# Altium PCB Shared_IoT_Dev_bk1.PcbDoc
Units mm, origin at the board's own origin, x right, y up, seen from the top; angles counter-clockwise.
Board outline 66.67 x 60.32 mm, 2 copper layers (Top Layer, Bottom Layer); 59 components, 68 nets, 257 pads, 0 vias.
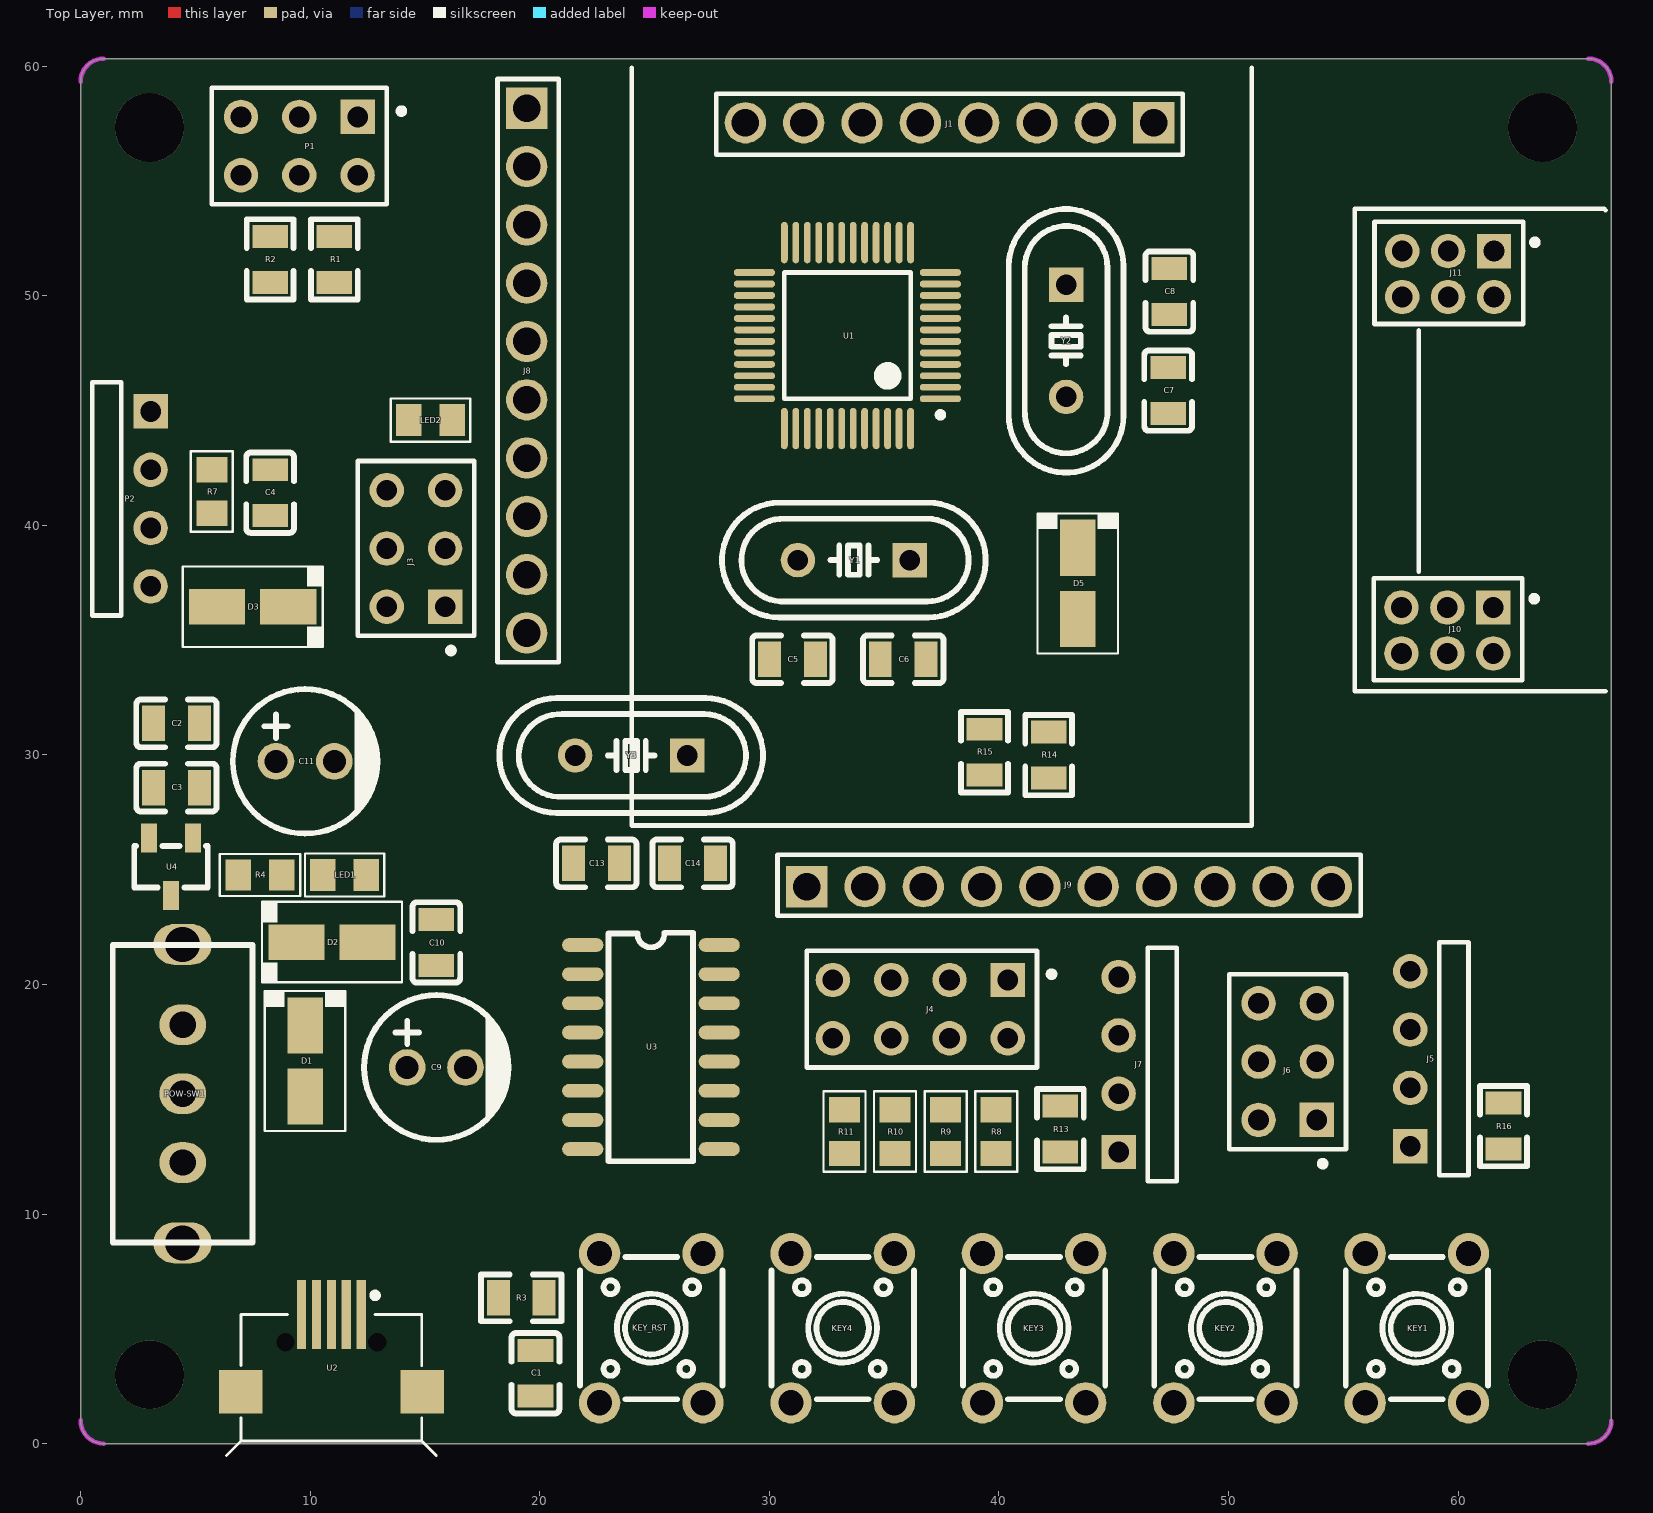
[diagram p0: Top Layer view]
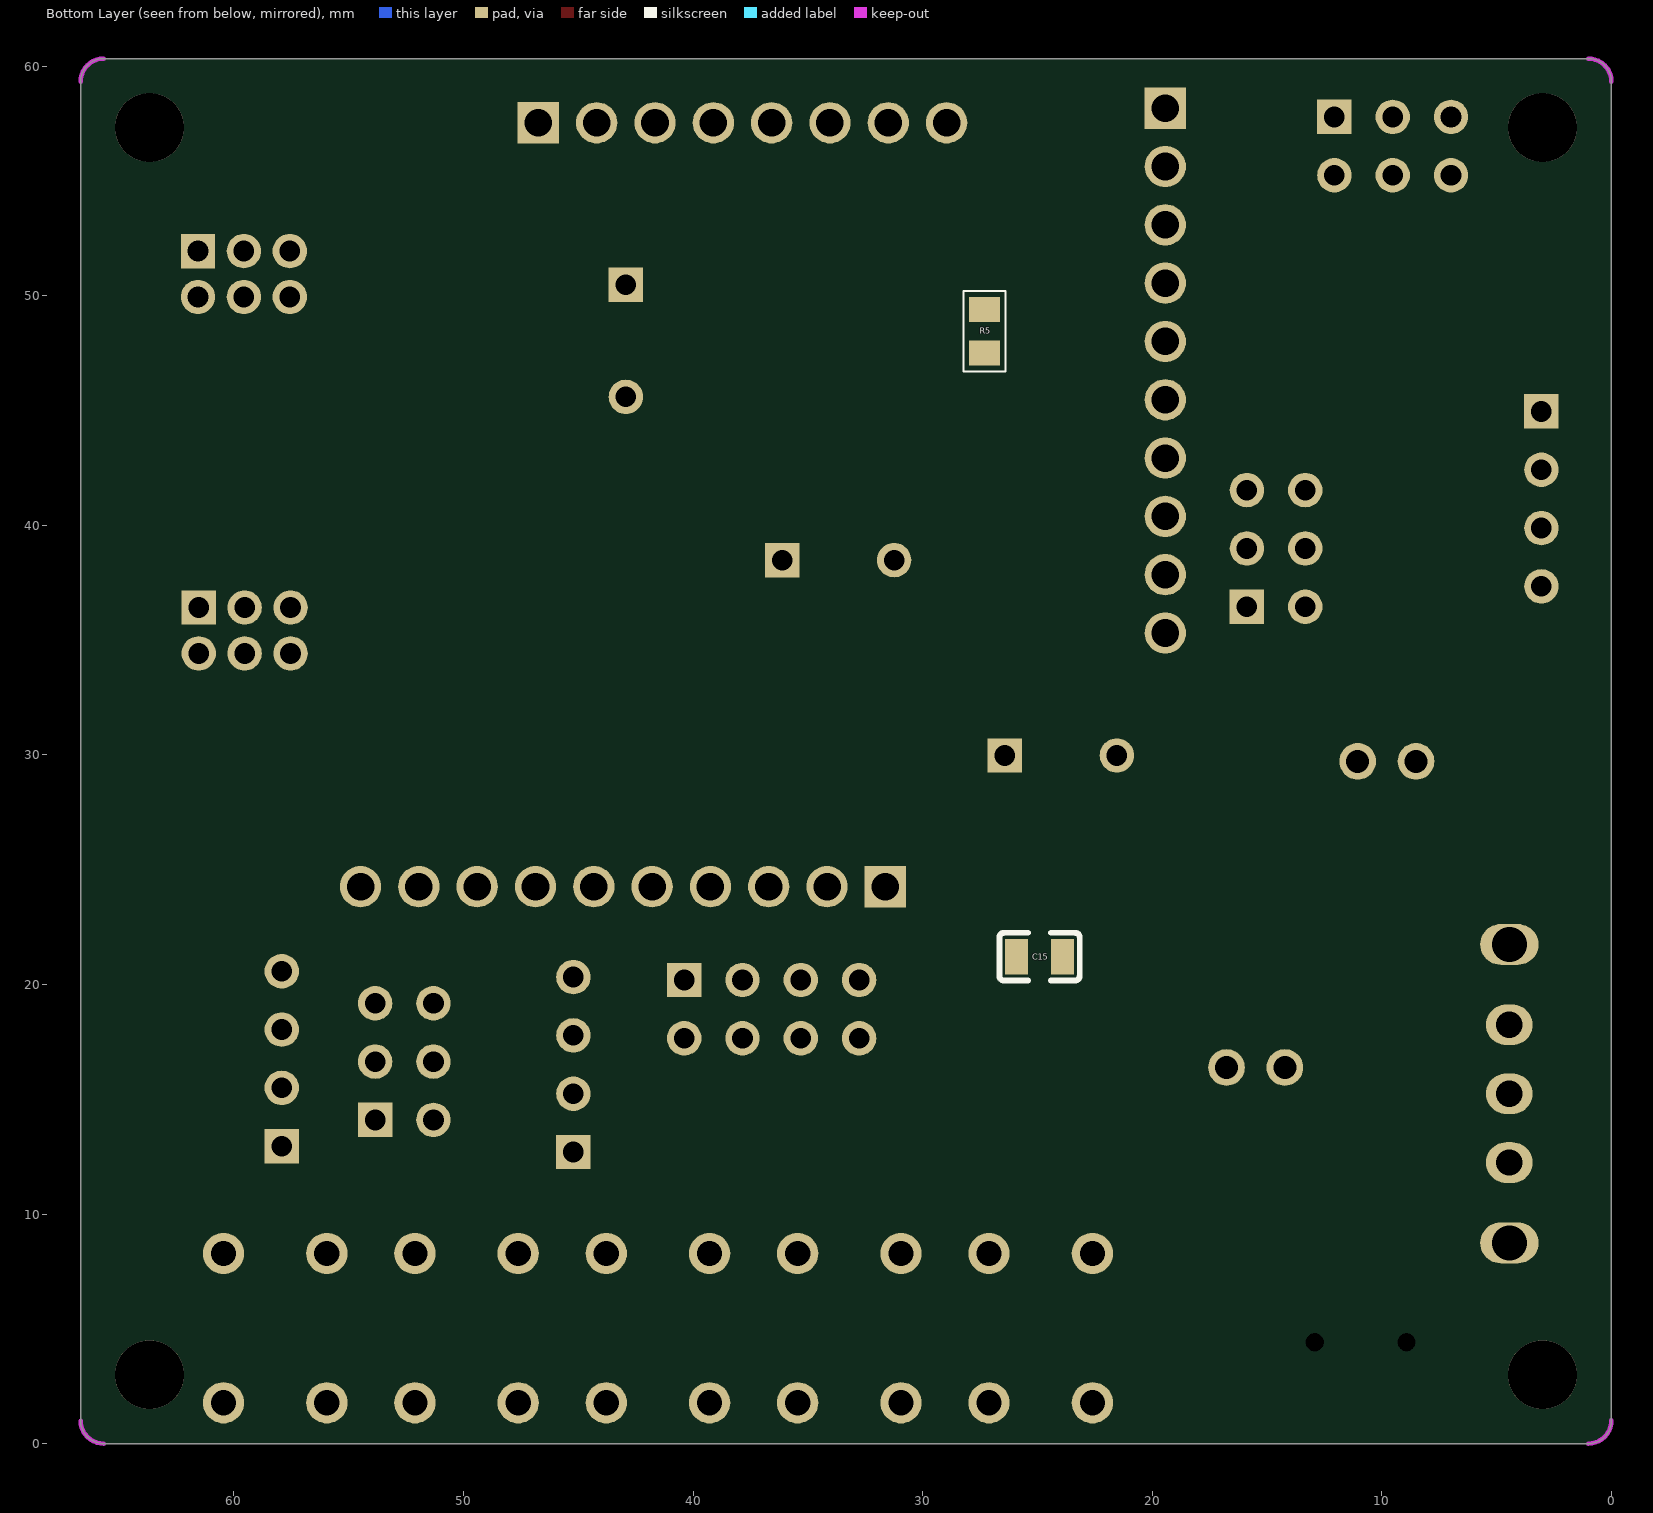
[diagram p1: Bottom Layer view, seen from below]

## Layer stack, top to bottom
Top Solder: solder mask 0.0102, Solder Resist, Dk 3.5
Top Layer: signal copper 0.0356
Dielectric 1: dielectric 0.32, FR-4, Dk 4.8
Bottom Layer: signal copper 0.0356
Bottom Solder: solder mask 0.0102, Solder Resist, Dk 3.5

## Board outline
1,0 cw(c1,1) 0,1.016 0,1 0,59.325 cw(c1,59.325) 1.016,60.325 1,60.325 65.675,60.325 cw(c65.675,59.325) 66.675,59.309 66.675,59.325 66.675,1 cw(c65.675,1) 65.659,0 65.675,0

## Design rules (kind name [scope] priority, off if disabled: settings)
Clearance via_poly [IsVia vs InPolygon] p1: gap=0.152
Clearance poly [InPolygon] p2: gap=0.254
Clearance all [All] p3: gap=0.152
HoleToHoleClearance [All] p1: gap=0 allowstackedmicrovias=TRUE
MinimumSolderMaskSliver [All] p1: minsoldermaskwidth=0
PolygonConnect [All] p1: connectstyle=Relief reliefconductorwidth=0.457 reliefentries=4 polygonreliefangle="90 Angle" airgapwidth=0.254
RoutingVias [All] p1: holewidth=0.305 width=0.61 viastyle="Through Hole" minholewidth=0.305 minwidth=0.61 maxholewidth=0.305 maxwidth=0.61
SilkToSilkClearance [All] p1: silktosilkclearance=0.051
SilkToSolderMaskClearance [IsPad] p1: minsilkscreentomaskgap=0.051 clearancetoexposedcopper=TRUE
SolderMaskExpansion [All] p1: expansion=0.064
Width gnd [InNetClass('GND')] p1: maxlimit=0.762 minlimit=0.254 preferedwidth=0.508
Width pwr [InNetClass('PWR')] p2: maxlimit=0.762 minlimit=0.254 preferedwidth=0.508
Width wall [All] p3: maxlimit=0.152 minlimit=0.152 preferedwidth=0.152
26 further rules are at their usual default settings.

## Classes and differential pairs
net class GND: GND
net class PWR: VBUS VCC3V3 VCC5V

## Components (designator, comment, footprint, x,y, rotation, side; value= is the part's Value field where it differs from the comment)
C1 "CAP" C0805 19.812,4.064 r270 top
C2 "CAP" C0805 3.175,31.369 r0 top
C3 "CAP" C0805 3.175,28.575 r0 top
C4 "CAP" C0805 8.255,40.418 r90 top
C5 "CAP" C0805 32.004,34.163 r180 top
C6 "CAP" C0805 34.83,34.163 r0 top
C7 "CAP" C0805 47.371,44.863 r90 top
C8 "CAP" C0805 47.423,51.178 r270 top
C9 "CAP_POL" CAP-TH_POL 14.224,16.383 r0 top
C10 "CAP" C0805 15.494,22.828 r270 top
C11 "CAP_POL" CAP-TH_POL 8.509,29.718 r0 top
C13 "22pF" C0805 21.463,25.273 r0 top
C14 "22pF" C0805 27.654,25.273 r180 top
C15 "0.1uF" C0805 25.908,21.209 r180 bottom
D1 "1N4007" SMA 9.779,16.663 r270 top
D2 "1N4007" SMA 10.948,21.844 r0 top
D3 "1N4007" SMA 7.493,36.449 r180 top
D5 "Diode 1N4148" SMA 43.434,37.465 r270 top
J1 "Header_8" HDR-TH_8P-P2.54-V 46.736,57.531 r180 top
J3 "Header 3X2" HDR2X3 15.875,36.449 r90 top
J4 "Header4x2" HDR2X4 40.386,20.193 r180 top
J5 "DHT11" HDR1X4H 57.912,12.954 r90 top
J6 "Header 3X2" HDR2X3 53.848,14.097 r90 top
J7 "DS18B20" HDR1X4H 45.212,12.7 r90 top
J8 "Header_10" HDR-TH_10P-P2.54-V 19.431,58.166 r270 top
J9 "Header_10" HDR-TH_10P-P2.54-V 31.623,24.257 r0 top
J10 "Header3X2_Small" HDR3X2_Small 61.531,36.417 r180 top
J11 "Header3X2_Small" HDR3X2_Small 61.563,51.943 r180 top
KEY1 "KEY" KEY-TH_4P 55.951,1.778 r90 top
KEY2 "KEY" KEY-TH_4P 47.615,1.778 r90 top
KEY3 "KEY" KEY-TH_4P 39.279,1.778 r90 top
KEY4 "KEY" KEY-TH_4P 30.942,1.778 r90 top
KEY_RST "KEY" KEY-TH_4P 22.606,1.778 r90 top
LED1 "LED2_1" 0805C 11.496,24.765 r0 top
LED2 "LED2_1" 0805C 15.24,44.577 r180 top
P1 "Header 3X2" HDR2X3 12.065,57.785 r180 top
P2 "SWD" HDR1X4H 3.048,44.958 r270 top
POW-SW1 "Switch" SW 4.445,15.24 r90 top
R1 "100K,0603" R0805 11.049,50.578 r90 top
R2 "100K,0603" R0805 8.255,52.578 r270 top
R3 "10K,0603" R0805 20.193,6.35 r180 top
R4 "Res2" 0805R 7.813,24.765 r0 top
R5 "Res2" 0805R 27.305,48.448 r270 bottom
R7 "Res2" 0805R 5.715,41.468 r90 top
R8 "Res2" 0805R 39.878,13.589 r270 top
R9 "Res2" 0805R 37.677,13.589 r270 top
R10 "Res2" 0805R 35.475,13.589 r270 top
R11 "Res2" 0805R 33.274,13.589 r270 top
R13 "4.7K" R0805 42.672,14.7 r270 top
R14 "100" R0805 42.164,28.988 r90 top
R15 "100" R0805 39.37,29.115 r90 top
R16 "4.7K" R0805 61.976,14.827 r270 top
U1 "STM32F103C8T6" 48P 33.401,48.26 r180 top
U2 "USB-mrico" MICRO_USB 10.922,3.937 r0 top
U3 "CH340G" CH340G_SOIC 21.869,21.717 r180 top
U4 "XC6206P332MR" XC_SOT-23-3 4.887,26.375 r90 top
Y1 "32.768K" CRYSTAL 36.119,38.481 r180 top
Y2 "8M" CRYSTAL 42.926,50.47 r270 top
Y3 "CRYSTAL_12M" CRYSTAL 26.416,29.972 r180 top

## Footprints (in the part's own frame and the unit in brackets; to place one, negate y for a bottom-side part, rotate by r counter-clockwise, add the part's x,y. Pads: shape width x height; smd on the part's side, far side on the other; paste and mask are expansions set on the pad)
48P [mm]
  oval 1.8x0.3 smd: 1(-4.05,2.75) 2(-4.05,2.25) 3(-4.05,1.75) 4(-4.05,1.25) 5(-4.05,0.75) 6(-4.05,0.25) 7(-4.05,-0.25) 8(-4.05,-0.75) 9(-4.05,-1.25) 10(-4.05,-1.75) 11(-4.05,-2.25) 12(-4.05,-2.75) 25(4.05,-2.75) 26(4.05,-2.25) 27(4.05,-1.75) 28(4.05,-1.25) 29(4.05,-0.75) 30(4.05,-0.25) 31(4.05,0.25) 32(4.05,0.75) 33(4.05,1.25) 34(4.05,1.75) 35(4.05,2.25) 36(4.05,2.75)
  oval 0.3x1.8 smd: 13(-2.75,-4.05) 14(-2.25,-4.05) 15(-1.75,-4.05) 16(-1.25,-4.05) 17(-0.75,-4.05) 18(-0.25,-4.05) 19(0.25,-4.05) 20(0.75,-4.05) 21(1.25,-4.05) 22(1.75,-4.05) 23(2.25,-4.05) 24(2.75,-4.05) 37(2.75,4.05) 38(2.25,4.05) 39(1.75,4.05) 40(1.25,4.05) 41(0.75,4.05) 42(0.25,4.05) 43(-0.25,4.05) 44(-0.75,4.05) 45(-1.25,4.05) 46(-1.75,4.05) 47(-2.25,4.05) 48(-2.75,4.05)
  silkscreen extent -4.18,-2.75 2.75,3.57, body extent -3.5,-3.5 3.5,3.5, height 1.6
0805C [mm] "Chip Capacitor, 2-Leads, Body 2.0x1.3mm, IPC Medium Density"
  rect 1.1x1.4 smd: 1(-0.95,0) 2(0.95,0)
  silkscreen extent -1.73,-0.94 1.73,0.94, body extent -1.05,-0.67 1.05,0.67, height 1.2
0805R [mm] "Chip Resistor, 2-Leads, Body 2.0x1.3mm, IPC Medium Density"
  rect 1.1x1.35 smd: 1(-0.95,0) 2(0.95,0)
  silkscreen extent -1.75,-0.91 1.75,0.91, body extent -1.05,-0.67 1.05,0.67, height 1.2
C0805 [mm]
  rect 1x1.55 smd: 1(0,0) 2(2,0)
  silkscreen extent -0.75,-1.04 2.75,1.04
CAP-TH_POL [mm]
  round 1.6 hole 1: 1(0,0) 2(2.54,0)
  silkscreen extent -1.88,-3.15 4.44,3.15
CH340G_SOIC [mm]
  oval 1.798x0.6 smd: 1(0,0) 2(0,1.27) 3(0,2.54) 4(0,3.81) 5(0,5.08) 6(0,6.35) 7(0,7.62) 8(0,8.89) 9(-5.944,8.89) 10(-5.944,7.62) 11(-5.944,6.35) 12(-5.944,5.08) 13(-5.944,3.81) 14(-5.944,2.54) 15(-5.944,1.27) 16(-5.944,0)
  silkscreen extent -4.8,-0.53 -1.12,9.42
CRYSTAL [mm]
  rect 1.5x1.5 hole 0.9: 1(0,0)
  round 1.5 hole 0.9: 2(4.877,0)
  silkscreen extent -3.3,-2.5 8.18,2.5
HDR1X4H [mm] "Connector; Header; 4 Position; Right Angle"
  rect 1.5x1.5 hole 0.9: 1(0,0)
  round 1.5 hole 0.9: 2(2.54,0) 3(5.08,0) 4(7.62,0)
  silkscreen extent -1.27,-2.54 8.89,-1.27
HDR2X3 [mm] "Connector; Header; 3x2 Position"
  rect 1.5x1.5 hole 0.9: 1(0,0)
  round 1.5 hole 0.9: 2(0,2.54) 3(2.54,0) 4(2.54,2.54) 5(5.08,0) 6(5.08,2.54)
  silkscreen extent -2.03,-1.27 6.35,3.81
HDR2X4 [mm]
  rect 1.5x1.5 hole 0.9: 1(0,0)
  round 1.5 hole 0.9: 2(0,2.54) 3(2.54,0) 4(2.54,2.54) 5(5.08,0) 6(5.08,2.54) 7(7.62,0) 8(7.62,2.54)
  silkscreen extent -2.03,-1.27 8.76,3.81
HDR3X2_Small [mm]
  rect 1.5x1.5 hole 0.9: 1(0,0)
  round 1.5 hole 0.9: 2(0,2) 3(2,0) 4(2,2) 5(4,0) 6(4,2)
  silkscreen extent -1.91,-1.27 5.21,3.18
HDR-TH_8P-P2.54-V [mm]
  rect 1.8x1.8 hole 1.2: 1(0,0)
  round 1.8 hole 1.2: 2(2.54,0) 3(5.08,0) 4(7.62,0) 5(10.16,0) 6(12.7,0) 7(15.24,0) 8(17.78,0)
  silkscreen extent -1.27,-1.27 19.05,1.4
HDR-TH_10P-P2.54-V [mm]
  rect 1.8x1.8 hole 1.2: 1(0,0)
  round 1.8 hole 1.2: 2(2.54,0) 3(5.08,0) 4(7.62,0) 5(10.16,0) 6(12.7,0) 7(15.24,0) 8(17.78,0) 9(20.32,0) 10(22.86,0)
  silkscreen extent -1.27,-1.27 24.13,1.4
KEY-TH_4P [mm]
  round 1.8 hole 1.1: 1(0,0) 2(6.502,0) 3(0,-4.501) 4(6.502,-4.501)
  silkscreen extent 0.15,-5.35 6.35,0.85
MICRO_USB [mm]
  rect 0.4x3 smd: 1(1.3,1.679) 2(0.65,1.679) 3(0,1.679) 4(-0.65,1.679) 5(-1.3,1.679)
  round 0 hole 0.8 unplated: MH1(2,0.471) MH2(-2,0.471)
  rect 1.9x1.9 smd: ""(-3.95,-1.679) ""(3.95,-1.679)
  silkscreen extent -4.57,-4.46 4.57,2.64
R0805 [mm]
  rect 1x1.55 smd: 1(0,0) 2(2,0)
  silkscreen extent -0.75,-1.02 2.75,1.02
SMA [mm] "Molded Diode, 2-Leads, Body 4.3x2.7mm, IPC Medium Density"
  rect 2.45x1.55 smd: 1(1.55,0) 2(-1.55,0)
  silkscreen extent -3.05,-1.75 3.05,1.75, body extent -2.3,-1.45 2.3,1.45, height 2.44
SW [mil]
  oval 70x80 hole 45: 1(-118.11,0) 2(0,0) 3(118.11,0)
  oval 70x100 hole 60: 4(-255.91,0) 5(255.91,0)
  silkscreen extent -255,-120 255,120
XC_SOT-23-3 [mm]
  rect 1.25x0.7 smd: 1(0,0) 2(0,1.9) 3(-2.499,0.95)
  silkscreen extent -2.15,-0.65 -0.35,2.55

## Part data
C13 C14 C15: library part CAP, "CAP"
D1 D2 D3: library part DIODE
D5: "High Conductance Fast Diode"
J3 J6 P1: "Header, 3-Pin, Dual row"
J5 J7 P2: library part "Header 4", "Header, 4-Pin"
LED1 LED2: "Typical RED, GREEN, YELLOW, AMBER GaAs LED"
POW-SW1: library part Swich_On_Off
R1 R2 R3: library part Res2, "Resistor"
R4 R5 R8 R9 R10 R11: library part Res_3, "Resistor"
R7: "Resistor"
R13 R14 R15 R16: library part RES, "RES"
U2: library part usb-STM
U4: "XC6206P332MR Power Lower to 3.3v"
Y1 Y2 Y3: library part CRYSTAL, "CRYSTAL"

## Free pads (board coordinates)
  round 3 hole 3 unplated paste+0.305: 0(3,3) 0(3,57.325) 0(63.675,3) 0(63.675,57.325)

## Nets (pads, with @x,y where several pads share a name; then routed paths per layer and width w, separated by ;. In a path a pad name is that pad's centre, name@x,y a point inside that pad or via, vN(x,y) a via of type N, cw(c..) or ccw(c..) an arc to the next point about the centre after c; other vN are vias at no path point)
BOOT0: R1.1 U1.44
BOOT1: R2.2 U1.20
D+: U2.3 U3.5
D-: U2.2 U3.6
DHT11_DQ: J5.2 J6.2 R16.1
DS_DQ: J6.4 J7.2 R13.1
ESP_RST: J9.7 J10.1
ESP_RX: J3.1 J10.6
ESP_TX: J3.2 J11.5
GND: C1.2 C2.2 C3.2 C4.2 C5.1 C6.1 C7.2 C8.2 C9.2 C10.1 C11.2 C13.2 C14.2 C15.2 D2.1 J1.2 J5.4 J6.5 J6.6 J7.3 J7.4 J9.10 J10.5 KEY1.1 KEY2.1 KEY3.1 KEY4.1 KEY_RST.1 LED1.2 LED2.2 P1.5 P1.6 P2.1 U1.8 U1.23 U1.35 U1.47 U2.4 U2.5 U3.1 U4.1
KEY1: J4.2 KEY1.3 R8.1
KEY2: J4.4 KEY2.3 R9.1
KEY3: J4.6 KEY3.3 R10.1
KEY4: J4.8 KEY4.3 R11.1
LED2: R5.1 U1.28
NetC4_1: C4.1 D3.2 R7.2
NetC13_1: C13.1 U3.7 Y3.2
NetC14_1: C14.1 U3.8 Y3.1
NetD1_1: D1.1 POW-SW1.2 POW-SW1.3
NetD5_2: D5.2 U1.1
NetJ6_1: J6.1 R14.1
NetJ6_3: J6.3 R15.1
NetLED1_1: LED1.1 R4.2
NetLED2_1: LED2.1 R5.2
NetP1_3: P1.3 R1.2
NetP1_4: P1.4 R2.1
NetP2_4: P2.4 R7.1
OLED_CS: J1.3 U1.21
OLED_D0: J1.6 U1.26
OLED_D1: J1.7 U1.27
OLED_DC: J1.5 U1.25
OLED_RES: J1.4 U1.22
OSCIN: C7.1 U1.5 Y2.2
OSCOUT: C8.1 U1.6 Y2.1
PA0: J8.1 U1.10
PA1: J8.2 U1.11
PA4: J8.3 U1.14
PA5: J8.4 U1.15
PA6: J8.5 U1.16
PA7: J8.6 U1.17
PA8: R14.2 U1.29
PA9: J9.1 U1.30
PA10: J9.2 U1.31
PA11: J4.5 U1.32
PA12: J4.7 U1.33
PA15: J8.7 U1.38
PB0: R15.2 U1.18
PB1: J8.8 U1.19
PB3: J8.9 U1.39
PB4: J8.10 U1.40
PB5: J9.3 U1.41
PB6: J9.4 U1.42
PB7: J9.5 U1.43
PB8: J4.1 U1.45
PB9: J4.3 U1.46
PC13: J9.6 U1.2
PC14: C5.2 U1.3 Y1.2
PC15: C6.2 U1.4 Y1.1
RESET: C1.1 KEY_RST.3 R3.1 U1.7
SWCLK: P2.2 U1.37
SWIO: P2.3 U1.34
URX: J3.4 U3.3
USART2_RX: J3.5 U1.13
USART2_TX: J3.6 U1.12
UTX: J3.3 U3.2
VBUS: POW-SW1.1 U2.1
VCC3V3: C2.1 C3.1 C11.1 C15.1 D3.1 D5.1 J1.1 J5.1 J7.1 J9.8 J10.4 P1.1 P1.2 R3.2 R8.2 R9.2 R10.2 R11.2 R13.2 R16.2 U1.9 U1.24 U1.36 U1.48 U3.4 U3.16 U4.2
VCC5V: C9.1 C10.2 D1.2 D2.2 J9.9 R4.1 U4.3
pads on no net: J1.8 J5.3 J10.2 J10.3 J11.1 J11.2 J11.3 J11.4 J11.6 KEY1.2 KEY1.4 KEY2.2 KEY2.4 KEY3.2 KEY3.4 KEY4.2 KEY4.4 KEY_RST.2 KEY_RST.4 POW-SW1.4 POW-SW1.5 U2. U2.MH1 U2.MH2 U3.9 U3.10 U3.11 U3.12 U3.13 U3.14 U3.15

## Keep-outs
Keep-Out Layer:
  lines w0.2: 0,1.016 ccw(c1,1) 1,0 ; 0,59.325 cw(c1,59.325) 1.016,60.325 ; 65.659,0 ccw(c65.675,1) 66.675,1 ; 65.675,60.325 cw(c65.675,59.325) 66.675,59.309

## Silkscreen, mask and mechanical layers (free items; w line width, h text height)
Top Overlay:
  lines w0.2: 24.003,59.924 24.003,26.924 51.003,26.924 51.003,59.924 ; 58.293,37.973 58.293,48.482 ; 66.421,32.766 55.499,32.766 55.499,53.783 66.359,53.783 66.421,53.721
Mechanical 13:
  lines w0.2: 0,1 0,59.325 ; 1,0 65.675,0 ; 1,60.325 65.675,60.325 ; 66.675,1 66.675,59.325